# Altium PCB PCB2_X10.PcbDoc
Units mm, origin at the board's own origin, x right, y up, seen from the top; angles counter-clockwise.
Board outline 81.41 x 84.96 mm, 2 copper layers (Top Layer, Bottom Layer); 50 components, 0 nets, 171 pads, 0 vias.
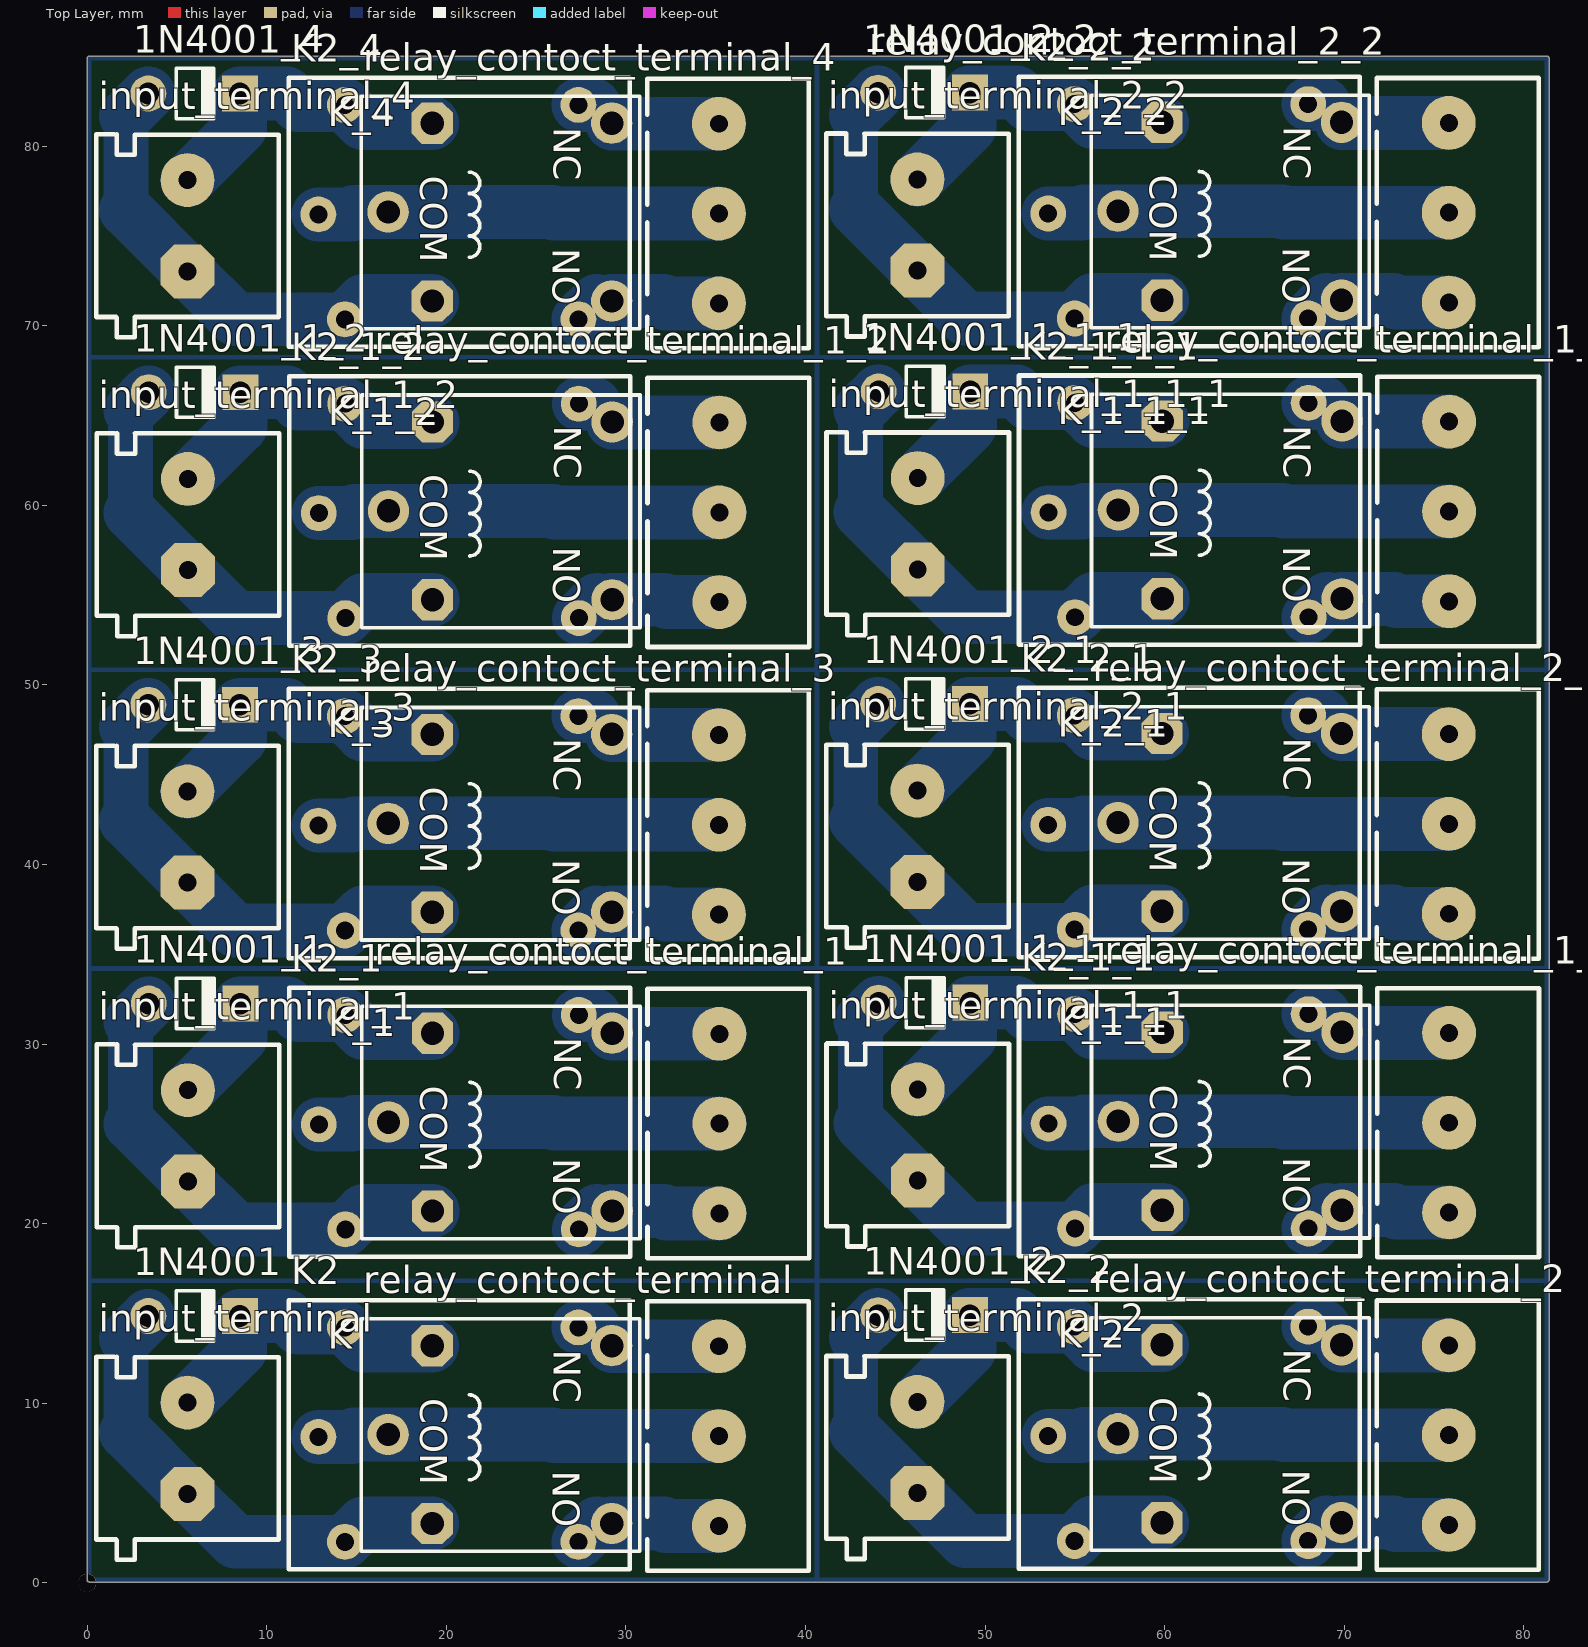
[diagram p0: Top Layer view]
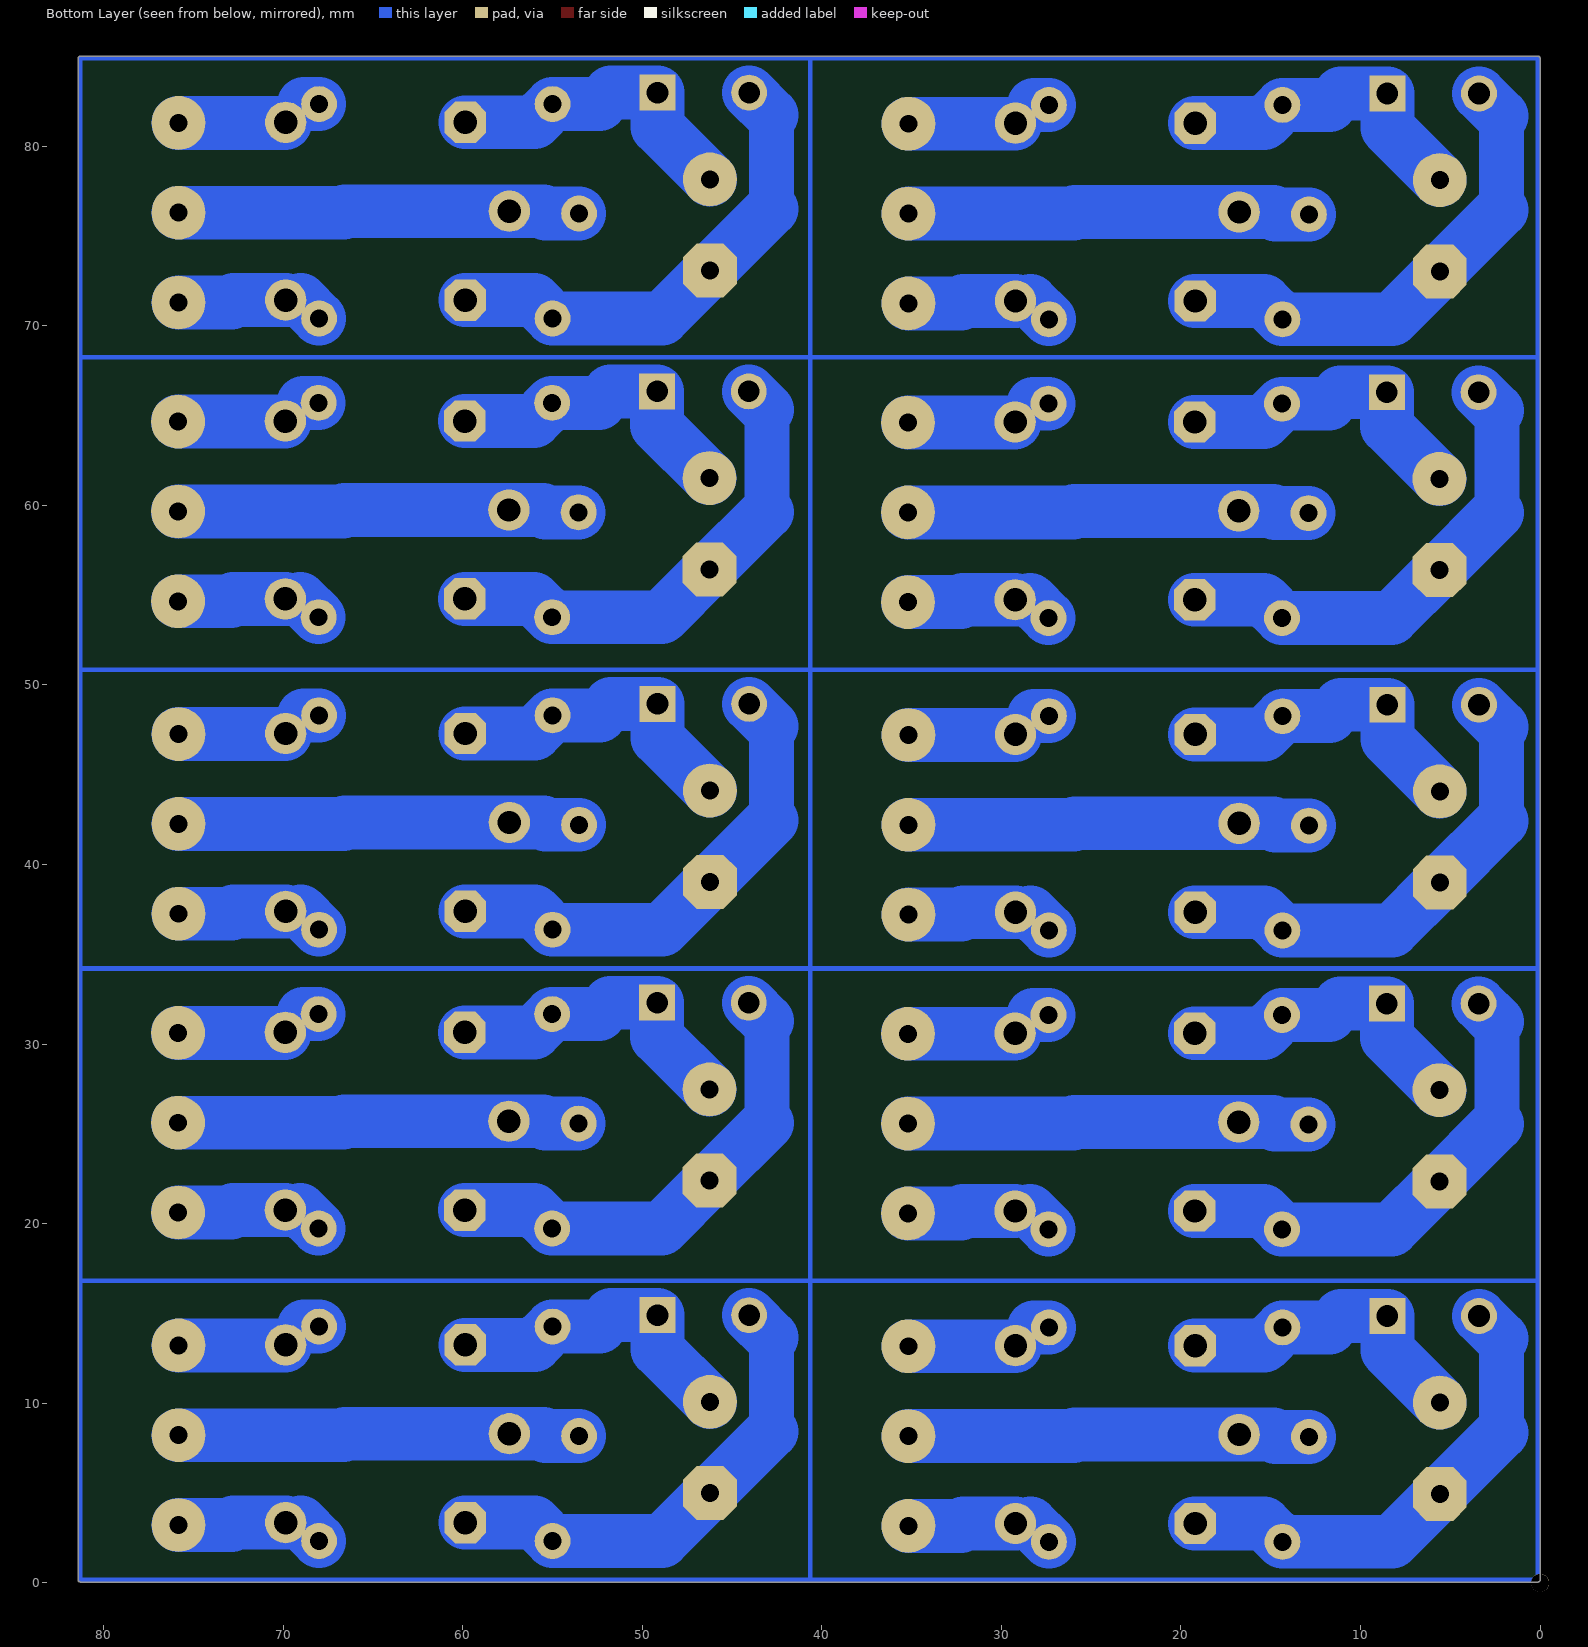
[diagram p1: Bottom Layer view, seen from below]

## Layer stack, top to bottom
Top Solder: solder mask 0.0102, Solder Resist, Dk 3.5
Top Layer: signal copper 0.0356
Dielectric 1: dielectric 0.32, FR-4, Dk 4.8
Bottom Layer: signal copper 0.0356
Bottom Solder: solder mask 0.0102, Solder Resist, Dk 3.5

## Board outline
0,0.174 ccw(c0.127,0.174) 0.127,0.047 81.28,0.047 ccw(c81.28,0.174) 81.407,0.174 81.407,84.883 ccw(c81.28,84.883) 81.28,85.01 0.127,85.01 ccw(c0.127,84.883) 0,84.883

## Design rules (kind name [scope] priority, off if disabled: settings)
Clearance [All] p1: gap=0.254 ignorepadtopadclearanceinfootprint=FALSE except(0: Arc-Hole Track-Hole SMDPad-Hole THPad-Hole Via-Hole Fill-Hole Poly-Hole Region-Hole Text-Hole)
PolygonConnect [All] p1: connectstyle=Relief reliefconductorwidth=0.254 reliefentries=4 polygonreliefangle="90 Angle" airgapwidth=0.254
RoutingVias [All] p1: holewidth=0.711 width=1.27 viastyle="Through Hole" minholewidth=0.711 minwidth=1.27 maxholewidth=0.711 maxwidth=1.27
SolderMaskExpansion [All] p1: expansion=0.102
Width [All] p1: maxlimit=0.254 minlimit=0.254 preferedwidth=0.254
30 further rules are at their usual default settings.

## Components (designator, comment, footprint, x,y, rotation, side; value= is the part's Value field where it differs from the comment)
1N4001 "Diode 1N4007 vertical" "D 50mm" 8.636,14.859 r0 top
1N4001_1 "Diode 1N4007 vertical" "D 50mm" 8.659,32.258 r0 top (schematic designator 1N4001)
1N4001_1_1 "Diode 1N4007 vertical" "D 50mm" 49.299,32.305 r0 top (schematic designator 1N4001)
1N4001_1_1_1 "Diode 1N4007 vertical" "D 50mm" 49.299,66.341 r0 top (schematic designator 1N4001)
1N4001_1_2 "Diode 1N4007 vertical" "D 50mm" 8.659,66.294 r0 top (schematic designator 1N4001)
1N4001_2 "Diode 1N4007 vertical" "D 50mm" 49.276,14.906 r0 top (schematic designator 1N4001)
1N4001_2_1 "Diode 1N4007 vertical" "D 50mm" 49.276,48.942 r0 top (schematic designator 1N4001)
1N4001_2_2 "Diode 1N4007 vertical" "D 50mm" 49.276,82.978 r0 top (schematic designator 1N4001)
1N4001_3 "Diode 1N4007 vertical" "D 50mm" 8.636,48.895 r0 top (schematic designator 1N4001)
1N4001_4 "Diode 1N4007 vertical" "D 50mm" 8.636,82.931 r0 top (schematic designator 1N4001)
input_terminal "CON2 pin blue" My_CN2 0.495,2.426 r90 top
input_terminal_1 "CON2 pin blue" My_CN2 0.518,19.825 r90 top (schematic designator input_terminal)
input_terminal_1_1 "CON2 pin blue" My_CN2 41.158,19.872 r90 top (schematic designator input_terminal)
input_terminal_1_1_1 "CON2 pin blue" My_CN2 41.158,53.908 r90 top (schematic designator input_terminal)
input_terminal_1_2 "CON2 pin blue" My_CN2 0.518,53.861 r90 top (schematic designator input_terminal)
input_terminal_2 "CON2 pin blue" My_CN2 41.135,2.473 r90 top (schematic designator input_terminal)
input_terminal_2_1 "CON2 pin blue" My_CN2 41.135,36.509 r90 top (schematic designator input_terminal)
input_terminal_2_2 "CON2 pin blue" My_CN2 41.135,70.545 r90 top (schematic designator input_terminal)
input_terminal_3 "CON2 pin blue" My_CN2 0.495,36.462 r90 top (schematic designator input_terminal)
input_terminal_4 "CON2 pin blue" My_CN2 0.495,70.498 r90 top (schematic designator input_terminal)
K "Relay" "Relay 15.40x12.10x13.10" 16.76,8.258 r270 top
K2 "Relay-05vDC" Relays 11.224,15.748 r270 top
K2_1 "Relay-05vDC" Relays 11.247,33.147 r270 top (schematic designator K2)
K2_1_1 "Relay-05vDC" Relays 51.887,33.194 r270 top (schematic designator K2)
K2_1_1_1 "Relay-05vDC" Relays 51.887,67.23 r270 top (schematic designator K2)
K2_1_2 "Relay-05vDC" Relays 11.247,67.183 r270 top (schematic designator K2)
K2_2 "Relay-05vDC" Relays 51.864,15.795 r270 top (schematic designator K2)
K2_2_1 "Relay-05vDC" Relays 51.864,49.831 r270 top (schematic designator K2)
K2_2_2 "Relay-05vDC" Relays 51.864,83.867 r270 top (schematic designator K2)
K2_3 "Relay-05vDC" Relays 11.224,49.784 r270 top (schematic designator K2)
K2_4 "Relay-05vDC" Relays 11.224,83.82 r270 top (schematic designator K2)
K_1 "Relay" "Relay 15.40x12.10x13.10" 16.783,25.657 r270 top (schematic designator K)
K_1_1 "Relay" "Relay 15.40x12.10x13.10" 57.423,25.704 r270 top (schematic designator K)
K_1_1_1 "Relay" "Relay 15.40x12.10x13.10" 57.423,59.74 r270 top (schematic designator K)
K_1_2 "Relay" "Relay 15.40x12.10x13.10" 16.783,59.693 r270 top (schematic designator K)
K_2 "Relay" "Relay 15.40x12.10x13.10" 57.4,8.305 r270 top (schematic designator K)
K_2_1 "Relay" "Relay 15.40x12.10x13.10" 57.4,42.341 r270 top (schematic designator K)
K_2_2 "Relay" "Relay 15.40x12.10x13.10" 57.4,76.377 r270 top (schematic designator K)
K_3 "Relay" "Relay 15.40x12.10x13.10" 16.76,42.294 r270 top (schematic designator K)
K_4 "Relay" "Relay 15.40x12.10x13.10" 16.76,76.33 r270 top (schematic designator K)
relay_contoct_terminal "Terminal" "Terminal 1*3" 31.179,15.675 r270 top
relay_contoct_terminal_1 "Terminal" "Terminal 1*3" 31.202,33.074 r270 top (schematic designator relay_contoct_terminal)
relay_contoct_terminal_1_1 "Terminal" "Terminal 1*3" 71.842,33.121 r270 top (schematic designator relay_contoct_terminal)
relay_contoct_terminal_1_1_1 "Terminal" "Terminal 1*3" 71.842,67.157 r270 top (schematic designator relay_contoct_terminal)
relay_contoct_terminal_1_2 "Terminal" "Terminal 1*3" 31.202,67.11 r270 top (schematic designator relay_contoct_terminal)
relay_contoct_terminal_2 "Terminal" "Terminal 1*3" 71.819,15.722 r270 top (schematic designator relay_contoct_terminal)
relay_contoct_terminal_2_1 "Terminal" "Terminal 1*3" 71.819,49.758 r270 top (schematic designator relay_contoct_terminal)
relay_contoct_terminal_2_2 "Terminal" "Terminal 1*3" 71.819,83.794 r270 top (schematic designator relay_contoct_terminal)
relay_contoct_terminal_3 "Terminal" "Terminal 1*3" 31.179,49.711 r270 top (schematic designator relay_contoct_terminal)
relay_contoct_terminal_4 "Terminal" "Terminal 1*3" 31.179,83.747 r270 top (schematic designator relay_contoct_terminal)

## Footprints (in the part's own frame and the unit in brackets; to place one, negate y for a bottom-side part, rotate by r counter-clockwise, add the part's x,y. Pads: shape width x height; smd on the part's side, far side on the other; paste and mask are expansions set on the pad)
"D 50mm" [mm] "50mm Pin Spacing"
  round 2 hole 1.2: 1(-5.23,0)
  rect 2x2 hole 1.2: 2(-0.127,0)
  silkscreen extent -3.68,-1.4 -1.49,1.4
My_CN2 [mm]
  oct 3x3 hole 1: 1(2.527,-5.093)
  round 3 hole 1: 2(7.607,-5.093)
  silkscreen extent -1.14,-10.17 10.16,-0.01
"Relay 15.40x12.10x13.10" [mm]
  round 2.3 hole 1.3: 1(0,0) 2(-4.95,12.45) 3(4.95,12.45)
  oct 2.3x2.3 hole 1.3: 4(-4.95,2.45) 5(4.95,2.45)
  silkscreen extent -6.45,-1.5 6.5,14, body extent -6.05,-1.3 6.05,14, height 15.6
Relays [mm]
  round 2 hole 1: 1(7.62,1.651) 2(1.524,16.129) 3(13.462,16.129) 4(1.524,3.127) 5(13.462,3.127)
  silkscreen extent 0,0 15,19
"Terminal 1*3" [mm]
  round 3 hole 1: 1(2.5,4) 2(7.5,4) 3(12.5,4)
  silkscreen extent 0,0 15,9

## Part data
1N4001 1N4001_1 1N4001_1_1 1N4001_1_1_1 1N4001_1_2 1N4001_2 1N4001_2_1 1N4001_2_2 1N4001_3 1N4001_4: "1 Amp General Purpose Rectifier", Publisher="seyed mohsen ghasemian"
input_terminal input_terminal_1 input_terminal_1_1 input_terminal_1_1_1 input_terminal_1_2 input_terminal_2 input_terminal_2_1 input_terminal_2_2 input_terminal_3 input_terminal_4: "Connector blue screw"
K K_1 K_1_1 K_1_1_1 K_1_2 K_2 K_2_1 K_2_2 K_3 K_4: "SPDT Relay", Company=E.P.I.L, Design_Date=2011/10/31, Designer="Eng. Saeid Jorablo"
K2 K2_1 K2_1_1 K2_1_1_1 K2_1_2 K2_2 K2_2_1 K2_2_2 K2_3 K2_4: "Relay-05vDC-240AC 5A", ComponentLinkURL=www.picpars.com, Designer="Seyed Mohsen Ghasemain"
relay_contoct_terminal relay_contoct_terminal_1 relay_contoct_terminal_1_1 relay_contoct_terminal_1_1_1 relay_contoct_terminal_1_2 relay_contoct_terminal_2 relay_contoct_terminal_2_1 relay_contoct_terminal_2_2 relay_contoct_terminal_3 relay_contoct_terminal_4: library part "Terminal 1*3", "Terminal 3 Pin 250VAC 16A", ComponentLinkURL=www.picpars.com, Designer="Seyed Mohsen Ghasemain", E-mail=picpars@gmail.com

## Free pads (board coordinates)
  round 1 hole 1: 2(0,0)

## Nets (pads, with @x,y where several pads share a name; then routed paths per layer and width w, separated by ;. In a path a pad name is that pad's centre, name@x,y a point inside that pad or via, vN(x,y) a via of type N, cw(c..) or ccw(c..) an arc to the next point about the centre after c; other vN are vias at no path point)
pads on no net: 1N4001.1 1N4001.2 1N4001_1.1 1N4001_1.2 1N4001_1_1.1 1N4001_1_1.2 1N4001_1_1_1.1 1N4001_1_1_1.2 1N4001_1_2.1 1N4001_1_2.2 1N4001_2.1 1N4001_2.2 1N4001_2_1.1 1N4001_2_1.2 1N4001_2_2.1 1N4001_2_2.2 1N4001_3.1 1N4001_3.2 1N4001_4.1 1N4001_4.2 input_terminal.1 input_terminal.2 input_terminal_1.1 input_terminal_1.2 input_terminal_1_1.1 input_terminal_1_1.2 input_terminal_1_1_1.1 input_terminal_1_1_1.2 input_terminal_1_2.1 input_terminal_1_2.2 input_terminal_2.1 input_terminal_2.2 input_terminal_2_1.1 input_terminal_2_1.2 input_terminal_2_2.1 input_terminal_2_2.2 input_terminal_3.1 input_terminal_3.2 input_terminal_4.1 input_terminal_4.2 K2.1 K2.2 K2.3 K2.4 K2.5 K2_1.1 K2_1.2 K2_1.3 K2_1.4 K2_1.5 K2_1_1.1 K2_1_1.2 K2_1_1.3 K2_1_1.4 K2_1_1.5 K2_1_1_1.1 K2_1_1_1.2 K2_1_1_1.3 K2_1_1_1.4 K2_1_1_1.5 K2_1_2.1 K2_1_2.2 K2_1_2.3 K2_1_2.4 K2_1_2.5 K2_2.1 K2_2.2 K2_2.3 K2_2.4 K2_2.5 K2_2_1.1 K2_2_1.2 K2_2_1.3 K2_2_1.4 K2_2_1.5 K2_2_2.1 K2_2_2.2 K2_2_2.3 K2_2_2.4 K2_2_2.5 K2_3.1 K2_3.2 K2_3.3 K2_3.4 K2_3.5 K2_4.1 K2_4.2 K2_4.3 K2_4.4 K2_4.5 K.1 K.2 K.3 K.4 K.5 K_1.1 K_1.2 K_1.3 K_1.4 K_1.5 K_1_1.1 K_1_1.2 K_1_1.3 K_1_1.4 K_1_1.5 K_1_1_1.1 K_1_1_1.2 K_1_1_1.3 K_1_1_1.4 K_1_1_1.5 K_1_2.1 K_1_2.2 K_1_2.3 K_1_2.4 K_1_2.5 K_2.1 K_2.2 K_2.3 K_2.4 K_2.5 K_2_1.1 K_2_1.2 K_2_1.3 K_2_1.4 K_2_1.5 K_2_2.1 K_2_2.2 K_2_2.3 K_2_2.4 K_2_2.5 K_3.1 K_3.2 K_3.3 K_3.4 K_3.5 K_4.1 K_4.2 K_4.3 K_4.4 K_4.5 relay_contoct_terminal.1 relay_contoct_terminal.2 relay_contoct_terminal.3 relay_contoct_terminal_1.1 relay_contoct_terminal_1.2 relay_contoct_terminal_1.3 relay_contoct_terminal_1_1.1 relay_contoct_terminal_1_1.2 relay_contoct_terminal_1_1.3 relay_contoct_terminal_1_1_1.1 relay_contoct_terminal_1_1_1.2 relay_contoct_terminal_1_1_1.3 relay_contoct_terminal_1_2.1 relay_contoct_terminal_1_2.2 relay_contoct_terminal_1_2.3 relay_contoct_terminal_2.1 relay_contoct_terminal_2.2 relay_contoct_terminal_2.3 relay_contoct_terminal_2_1.1 relay_contoct_terminal_2_1.2 relay_contoct_terminal_2_1.3 relay_contoct_terminal_2_2.1 relay_contoct_terminal_2_2.2 relay_contoct_terminal_2_2.3 relay_contoct_terminal_3.1 relay_contoct_terminal_3.2 relay_contoct_terminal_3.3 relay_contoct_terminal_4.1 relay_contoct_terminal_4.2 relay_contoct_terminal_4.3
copper on no net: | length 1574
  Bottom Layer w0.254: 0.127,16.811 40.64,16.811 81.28,16.811 ; 0.127,50.847 40.64,50.847 81.28,50.847 ; 0.127,68.199 0.127,84.883 40.64,84.883 ; 40.64,0.174 40.64,34.21 40.64,68.246 40.64,84.883 ; 0.127,34.21 0.127,68.246 81.28,68.246 ; 0.127,34.21 81.28,34.21 ; 0.127,34.21 0.127,0.174 81.28,0.174 81.28,34.21 ; 40.64,84.883 81.28,84.883 81.28,68.246 ; 81.28,34.21 81.28,68.246
  Bottom Layer w0.5: 11.1,14.859 11.735,14.224 ; 11.1,48.895 11.735,48.26 ; 11.1,82.931 11.735,82.296 ; 11.123,32.258 11.758,31.623 ; 11.123,66.294 11.758,65.659 ; 14.732,8.128 14.862,8.258 ; 14.732,42.164 14.862,42.294 ; 14.732,76.2 14.862,76.33 ; 14.755,25.527 14.885,25.657 ; 14.755,59.563 14.885,59.693 ; 25.908,8.258 25.991,8.175 ; 25.908,42.294 25.991,42.211 ; 25.908,76.33 25.991,76.247 ; 25.931,25.657 26.014,25.574 ; 25.931,59.693 26.014,59.61 ; 28.194,14.224 29.21,13.208 ; 28.194,48.26 29.21,47.244 ; 28.194,82.296 29.21,81.28 ; 28.217,31.623 29.233,30.607 ; 28.217,65.659 29.233,64.643 ; 28.375,3.308 29.21,3.308 ; 28.375,37.344 29.21,37.344 ; 28.375,71.38 29.21,71.38 ; 28.398,20.707 29.233,20.707 ; 28.398,54.743 29.233,54.743 ; 32.106,3.308 32.239,3.175 ; 32.106,37.344 32.239,37.211 ; 32.106,71.38 32.239,71.247 ; 32.129,20.707 32.262,20.574 ; 32.129,54.743 32.262,54.61 ; 51.74,14.906 52.375,14.271 ; 51.74,48.942 52.375,48.307 ; 51.74,82.978 52.375,82.343 ; 51.763,32.305 52.398,31.67 ; 51.763,66.341 52.398,65.706 ; 55.372,8.175 55.502,8.305 ; 55.372,42.211 55.502,42.341 ; 55.372,76.247 55.502,76.377 ; 55.395,25.574 55.525,25.704 ; 55.395,59.61 55.525,59.74 ; 66.548,8.305 66.631,8.222 ; 66.548,42.341 66.631,42.258 ; 66.548,76.377 66.631,76.294 ; 66.571,25.704 66.654,25.621 ; 66.571,59.74 66.654,59.657 ; 68.834,14.271 69.85,13.255 ; 68.834,48.307 69.85,47.291 ; 68.834,82.343 69.85,81.327 ; 68.857,31.67 69.873,30.654 ; 68.857,65.706 69.873,64.69 ; 69.015,3.355 69.85,3.355 ; 69.015,37.391 69.85,37.391 ; 69.015,71.427 69.85,71.427 ; 69.038,20.754 69.873,20.754 ; 69.038,54.79 69.873,54.79 ; 72.746,3.355 72.879,3.222 ; 72.746,37.391 72.879,37.258 ; 72.746,71.427 72.879,71.294 ; 72.769,20.754 72.902,20.621 ; 72.769,54.79 72.902,54.657
  Bottom Layer w1: 29.21,13.208 29.243,13.175 ; 29.21,47.244 29.243,47.211 ; 29.21,81.28 29.243,81.247 ; 29.233,30.607 29.266,30.574 ; 29.233,64.643 29.266,64.61 ; 69.85,13.255 69.883,13.222 ; 69.85,47.291 69.883,47.258 ; 69.85,81.327 69.883,81.294 ; 69.873,30.654 69.906,30.621 ; 69.873,64.69 69.906,64.657
  Bottom Layer w2.5: 2.159,8.382 2.159,13.612 ; 2.159,42.418 2.159,47.648 ; 2.159,76.454 2.159,81.684 ; 2.413,25.55 2.413,31.242 ; 2.413,59.586 2.413,65.278 ; 42.799,8.429 42.799,13.659 ; 42.799,42.465 42.799,47.695 ; 42.799,76.501 42.799,81.731 ; 43.053,25.597 43.053,31.289 ; 43.053,59.633 43.053,65.325
  Bottom Layer w3: 2.159,8.382 5.588,4.953 8.255,2.286 14.351,2.286 15.373,3.308 19.21,3.308 ; 2.159,13.612 3.406,14.859 ; 2.159,42.418 5.588,38.989 8.255,36.322 14.351,36.322 15.373,37.344 19.21,37.344 ; 2.159,47.648 3.406,48.895 ; 2.159,76.454 5.588,73.025 8.255,70.358 14.351,70.358 15.373,71.38 19.21,71.38 ; 2.159,81.684 3.406,82.931 ; 2.413,25.55 5.611,22.352 8.278,19.685 14.374,19.685 15.396,20.707 19.233,20.707 ; 2.413,31.242 3.429,32.258 ; 2.413,59.586 5.611,56.388 8.278,53.721 14.374,53.721 15.396,54.743 19.233,54.743 ; 2.413,65.278 3.429,66.294 ; 5.588,10.033 8.509,12.954 8.509,14.859 11.1,14.859 ; 5.588,44.069 8.509,46.99 8.509,48.895 11.1,48.895 ; 5.588,78.105 8.509,81.026 8.509,82.931 11.1,82.931 ; 5.611,27.432 8.532,30.353 8.532,32.258 11.123,32.258 ; 5.611,61.468 8.532,64.389 8.532,66.294 11.123,66.294 ; 11.735,14.224 14.351,14.224 15.367,13.208 19.21,13.208 ; 11.735,48.26 14.351,48.26 15.367,47.244 19.21,47.244 ; 11.735,82.296 14.351,82.296 15.367,81.28 19.21,81.28 ; 11.758,31.623 14.374,31.623 15.39,30.607 19.233,30.607 ; 11.758,65.659 14.374,65.659 15.39,64.643 19.233,64.643 ; 12.875,8.128 14.732,8.128 ; 12.875,42.164 14.732,42.164 ; 12.875,76.2 14.732,76.2 ; 12.898,25.527 14.755,25.527 ; 12.898,59.563 14.755,59.563 ; 14.862,8.258 16.76,8.258 25.908,8.258 ; 14.862,42.294 16.76,42.294 25.908,42.294 ; 14.862,76.33 16.76,76.33 25.908,76.33 ; 14.885,25.657 16.783,25.657 25.931,25.657 ; 14.885,59.693 16.783,59.693 25.931,59.693 ; 25.991,8.175 35.179,8.175 ; 25.991,42.211 35.179,42.211 ; 25.991,76.247 35.179,76.247 ; 26.014,25.574 35.202,25.574 ; 26.014,59.61 35.202,59.61 ; 27.353,2.286 28.375,3.308 ; 27.353,14.224 28.194,14.224 ; 27.353,36.322 28.375,37.344 ; 27.353,48.26 28.194,48.26 ; 27.353,70.358 28.375,71.38 ; 27.353,82.296 28.194,82.296 ; 27.376,19.685 28.398,20.707 ; 27.376,31.623 28.217,31.623 ; 27.376,53.721 28.398,54.743 ; 27.376,65.659 28.217,65.659 ; 29.21,3.308 32.106,3.308 ; 29.21,37.344 32.106,37.344 ; 29.21,71.38 32.106,71.38 ; 29.233,20.707 32.129,20.707 ; 29.233,54.743 32.129,54.743 ; 29.243,13.175 35.179,13.175 ; 29.243,47.211 35.179,47.211 ; 29.243,81.247 35.179,81.247 ; 29.266,30.574 35.202,30.574 ; 29.266,64.61 35.202,64.61 ; 32.239,3.175 35.179,3.175 ; 32.239,37.211 35.179,37.211 ; 32.239,71.247 35.179,71.247 ; 32.262,20.574 35.202,20.574 ; 32.262,54.61 35.202,54.61 ; 42.799,8.429 46.228,5 48.895,2.333 54.991,2.333 56.013,3.355 59.85,3.355 ; 42.799,13.659 44.046,14.906 ; 42.799,42.465 46.228,39.036 48.895,36.369 54.991,36.369 56.013,37.391 59.85,37.391 ; 42.799,47.695 44.046,48.942 ; 42.799,76.501 46.228,73.072 48.895,70.405 54.991,70.405 56.013,71.427 59.85,71.427 ; 42.799,81.731 44.046,82.978 ; 43.053,25.597 46.251,22.399 48.918,19.732 55.014,19.732 56.036,20.754 59.873,20.754 ; 43.053,31.289 44.069,32.305 ; 43.053,59.633 46.251,56.435 48.918,53.768 55.014,53.768 56.036,54.79 59.873,54.79 ; 43.053,65.325 44.069,66.341 ; 46.228,10.08 49.149,13.001 49.149,14.906 51.74,14.906 ; 46.228,44.116 49.149,47.037 49.149,48.942 51.74,48.942 ; 46.228,78.152 49.149,81.073 49.149,82.978 51.74,82.978 ; 46.251,27.479 49.172,30.4 49.172,32.305 51.763,32.305 ; 46.251,61.515 49.172,64.436 49.172,66.341 51.763,66.341 ; 52.375,14.271 54.991,14.271 56.007,13.255 59.85,13.255 ; 52.375,48.307 54.991,48.307 56.007,47.291 59.85,47.291 ; 52.375,82.343 54.991,82.343 56.007,81.327 59.85,81.327 ; 52.398,31.67 55.014,31.67 56.03,30.654 59.873,30.654 ; 52.398,65.706 55.014,65.706 56.03,64.69 59.873,64.69 ; 53.515,8.175 55.372,8.175 ; 53.515,42.211 55.372,42.211 ; 53.515,76.247 55.372,76.247 ; 53.538,25.574 55.395,25.574 ; 53.538,59.61 55.395,59.61 ; 55.502,8.305 57.4,8.305 66.548,8.305 ; 55.502,42.341 57.4,42.341 66.548,42.341 ; 55.502,76.377 57.4,76.377 66.548,76.377 ; 55.525,25.704 57.423,25.704 66.571,25.704 ; 55.525,59.74 57.423,59.74 66.571,59.74 ; 66.631,8.222 75.819,8.222 ; 66.631,42.258 75.819,42.258 ; 66.631,76.294 75.819,76.294 ; 66.654,25.621 75.842,25.621 ; 66.654,59.657 75.842,59.657 ; 67.993,2.333 69.015,3.355 ; 67.993,14.271 68.834,14.271 ; 67.993,36.369 69.015,37.391 ; 67.993,48.307 68.834,48.307 ; 67.993,70.405 69.015,71.427 ; 67.993,82.343 68.834,82.343 ; 68.016,19.732 69.038,20.754 ; 68.016,31.67 68.857,31.67 ; 68.016,53.768 69.038,54.79 ; 68.016,65.706 68.857,65.706 ; 69.85,3.355 72.746,3.355 ; 69.85,37.391 72.746,37.391 ; 69.85,71.427 72.746,71.427 ; 69.873,20.754 72.769,20.754 ; 69.873,54.79 72.769,54.79 ; 69.883,13.222 75.819,13.222 ; 69.883,47.258 75.819,47.258 ; 69.883,81.294 75.819,81.294 ; 69.906,30.621 75.842,30.621 ; 69.906,64.657 75.842,64.657 ; 72.879,3.222 75.819,3.222 ; 72.879,37.258 75.819,37.258 ; 72.879,71.294 75.819,71.294 ; 72.902,20.621 75.842,20.621 ; 72.902,54.657 75.842,54.657

## Text inside footprints (layer, text, board x,y; h text height)
K: Top Overlay "NC" at 25.98,12.982 h1.5 r270; Top Overlay "NO" at 25.929,6.251 h1.5 r270; Top Overlay "COM" at 18.538,10.29 h1.5 r270
K_1: Top Overlay "NC" at 26.003,30.381 h1.5 r270; Top Overlay "NO" at 25.952,23.65 h1.5 r270; Top Overlay "COM" at 18.561,27.689 h1.5 r270
K_1_1: Top Overlay "NC" at 66.643,30.428 h1.5 r270; Top Overlay "NO" at 66.592,23.697 h1.5 r270; Top Overlay "COM" at 59.201,27.736 h1.5 r270
K_1_1_1: Top Overlay "NC" at 66.643,64.464 h1.5 r270; Top Overlay "NO" at 66.592,57.733 h1.5 r270; Top Overlay "COM" at 59.201,61.772 h1.5 r270
K_1_2: Top Overlay "NC" at 26.003,64.417 h1.5 r270; Top Overlay "NO" at 25.952,57.686 h1.5 r270; Top Overlay "COM" at 18.561,61.725 h1.5 r270
K_2: Top Overlay "NC" at 66.62,13.029 h1.5 r270; Top Overlay "NO" at 66.569,6.298 h1.5 r270; Top Overlay "COM" at 59.178,10.337 h1.5 r270
K_2_1: Top Overlay "NC" at 66.62,47.065 h1.5 r270; Top Overlay "NO" at 66.569,40.334 h1.5 r270; Top Overlay "COM" at 59.178,44.373 h1.5 r270
K_2_2: Top Overlay "NC" at 66.62,81.101 h1.5 r270; Top Overlay "NO" at 66.569,74.37 h1.5 r270; Top Overlay "COM" at 59.178,78.409 h1.5 r270
K_3: Top Overlay "NC" at 25.98,47.018 h1.5 r270; Top Overlay "NO" at 25.929,40.287 h1.5 r270; Top Overlay "COM" at 18.538,44.326 h1.5 r270
K_4: Top Overlay "NC" at 25.98,81.054 h1.5 r270; Top Overlay "NO" at 25.929,74.323 h1.5 r270; Top Overlay "COM" at 18.538,78.362 h1.5 r270